# Altium PCB 控制器终.PcbDoc (part 1 of 2)
Units mil, origin at the board's own origin, x right, y up, seen from the top; angles counter-clockwise.
Board outline 4045 x 3522 mil, 2 copper layers (Top Layer, Bottom Layer); 118 components, 129 nets, 483 pads, 116 vias.
Unrouted connection lines stored in the file: 1.
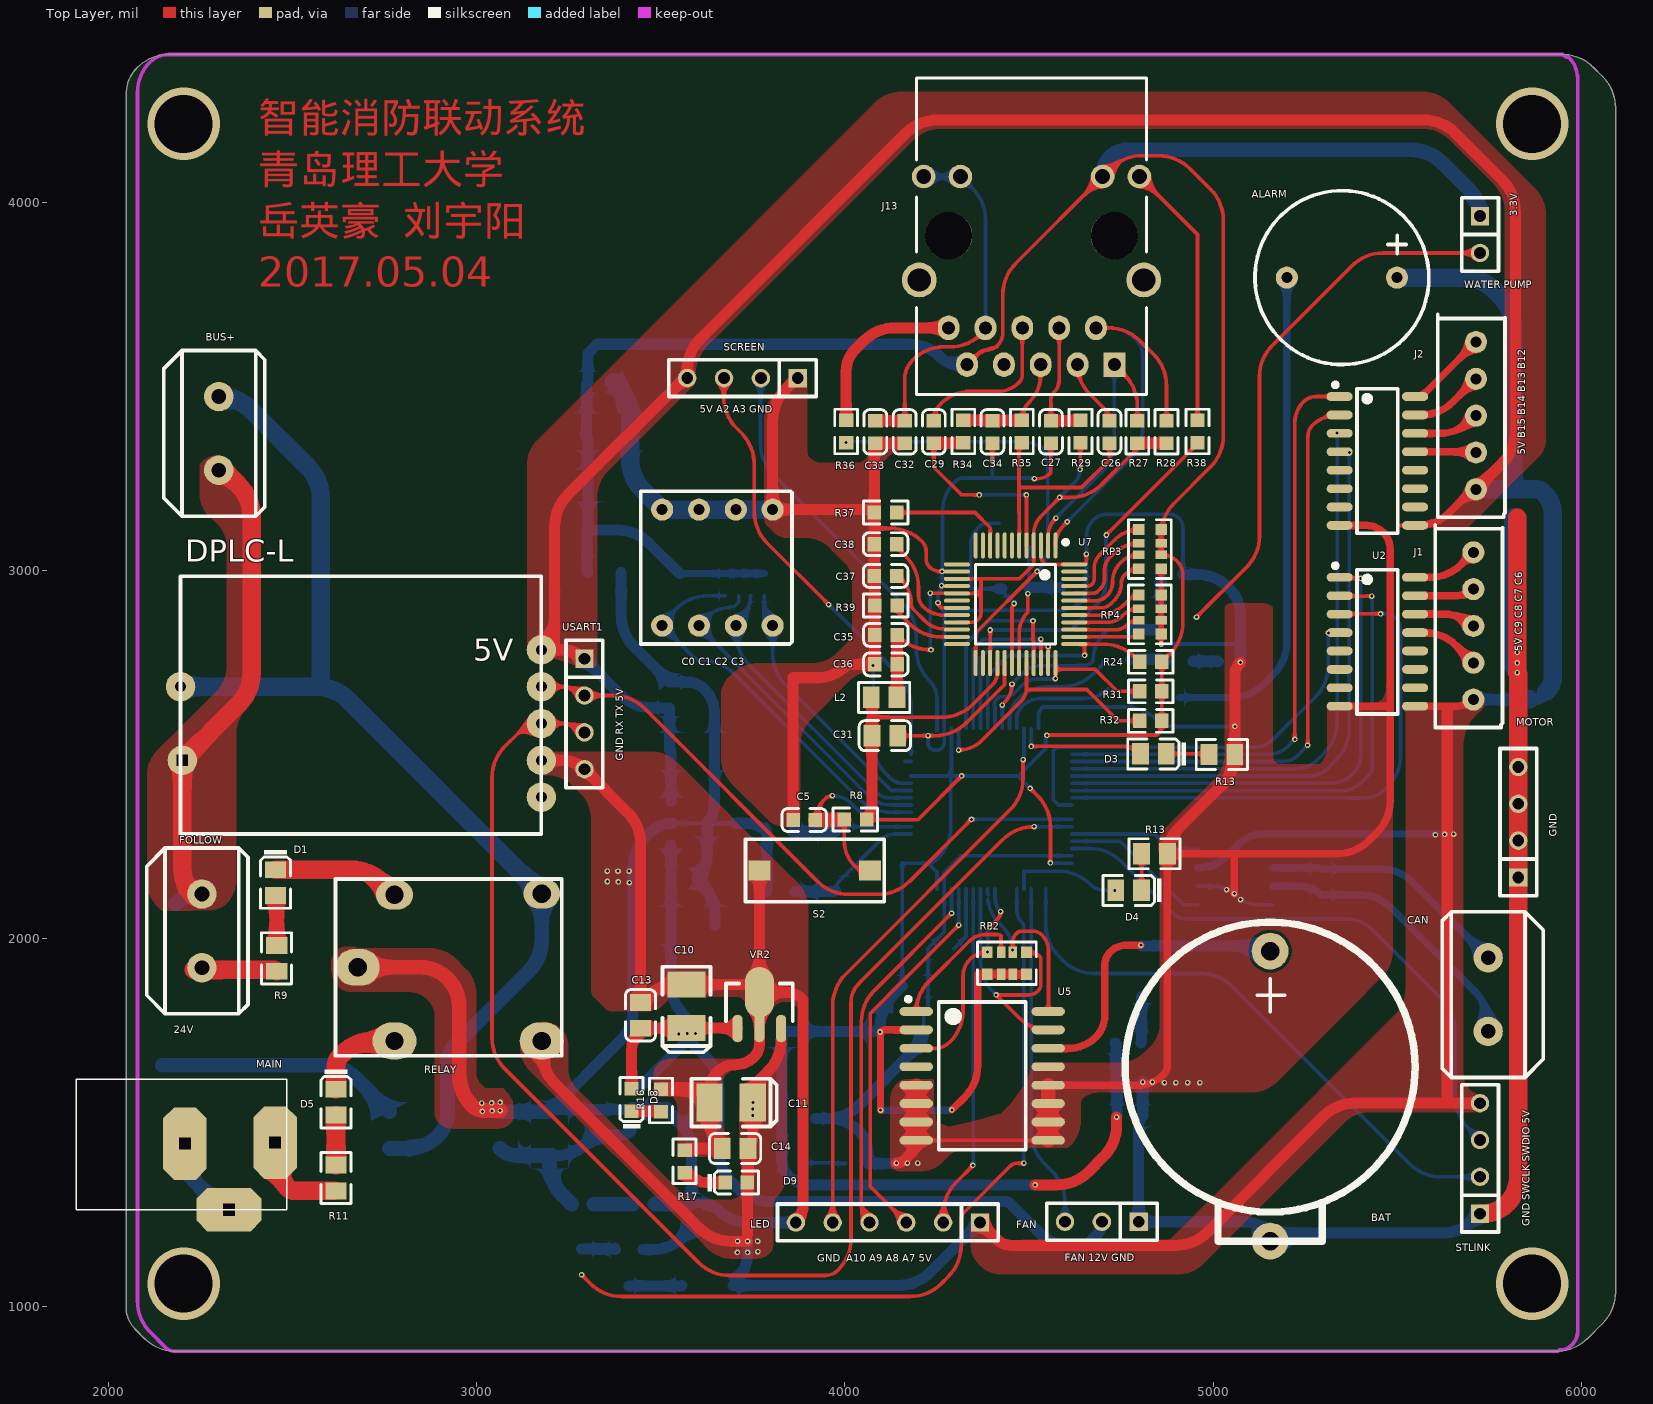
[diagram p0: Top Layer view]
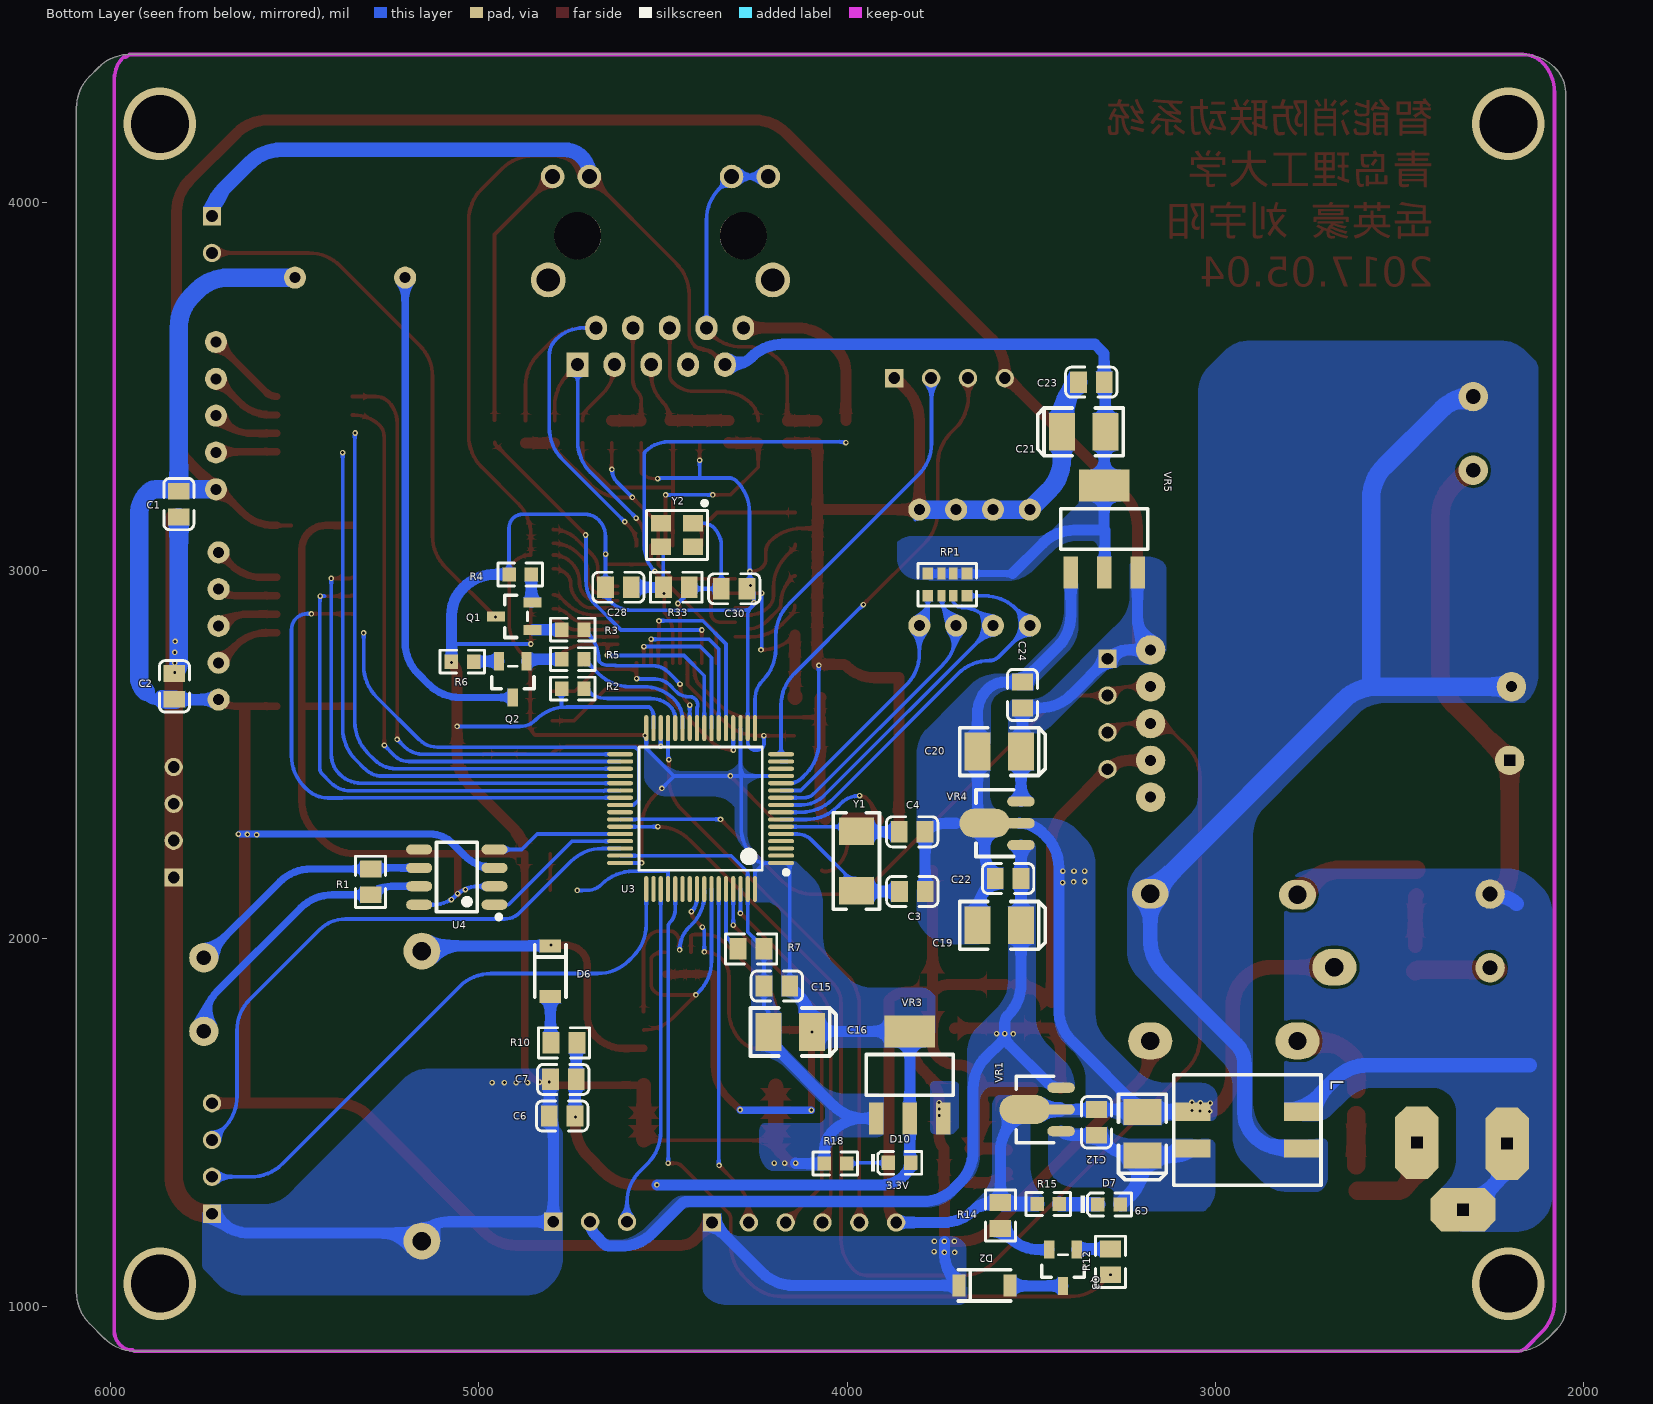
[diagram p1: Bottom Layer view, seen from below]

## Layer stack, top to bottom
Top Solder: solder mask 0.4, Solder Resist, Dk 3.5
Top Layer: signal copper 1.4
Dielectric 1: dielectric 12.6, FR-4, Dk 4.8
Bottom Layer: signal copper 1.4
Bottom Solder: solder mask 0.4, Solder Resist, Dk 3.5

## Board outline
2073,939 cw(c2133.36,999.36) 2048,999.36 2048,4291.66 cw(c2152.63,4291.66) 2078.64,4365.64 cw(c2164,4280.29) 2164,4401 5949,4401 cw(c5949,4282.7) 6032.65,4366.35 6057.64,4341.36 cw(c5972.29,4256) 6093,4256 6093,1040 cw(c5972.29,1040) 6057.64,954.64 6017.36,914.36 cw(c5932,999.71) 5932,879 2183,879 cw(c2183,999.71) 2097.64,914.36

## Design rules (kind name [scope] priority, off if disabled: settings)
Clearance [All] p1: gap=8
PlaneConnect [All] p1: planeconnectstyle=Direct reliefexpansion=20 reliefentries=4 reliefconductorwidth=10 reliefairgap=10
PolygonConnect [All] p1: connectstyle=Direct reliefconductorwidth=10 reliefentries=4 polygonreliefangle="90 Angle" airgapwidth=10
RoutingVias [All] p1: holewidth=8 width=15 viastyle="Through Hole" minholewidth=5 minwidth=10 maxholewidth=28 maxwidth=50
SolderMaskExpansion [All] p1: expansion=4
Width [All] p1: maxlimit=80 minlimit=10 preferedwidth=30
29 further rules are at their usual default settings.

## Classes and differential pairs
component class 控制器: ALARM BAT "C0 C1 C2 C3" C1 C2 C3 C4 C5 C6 C7 C9 C11 C12 C13 C14 C15 C16 C19 C20 C21 C22 C23 C26 C27 C28 C29 C30 C31 C32 C33 C34 C35 C36 C37 C38 CAN D1 D2 D3 D4 D5 D6 D7 D8 D9 D10 FAN FOLLOW GND J1 J2 J13 J14 L2 LED MOTOR Q1 Q2 Q3 R1 R2 R3 R4 R5 R6 R7 R8 R9 R10 R11 R13 R14 R15 R16 R17 R18 R24 R27 R28 R29 R31 R32 R33 R34 R35 R36 R37 R38 R39 RELAY RP1 RP2 RP3 RP4 S2 SCREEN STLINK U2 U3 U4 U5 U7 USART1 VR1 VR2 VR3 VR4 VR5 "WATER PUMP" Y1 Y2

## Components (designator, comment, footprint, x,y, rotation, side; value= is the part's Value field where it differs from the comment)
ALARM "蜂鸣器" 蜂鸣器 5349.9,3795 r90 top (schematic designator w1)
BAT "BAT" BAT 5155,1651 r270 top (schematic designator 1)
BUS+ "followSOURCE" 蓝端子 2300,3272 r90 top (schematic designator P1)
"C0 C1 C2 C3" "SW-DIP4" 4位拨码开关 3504,2850 r90 top (schematic designator S1)
C1 "100nF(104) 10% 50V" LC-0805_C 5815,3180 r90 bottom
C2 "100nF(104) 10% 50V" LC-0805_C 5827,2685 r270 bottom
C3 "22pF (220) 5% 50V" LC-0805_C 3823,2128 r0 bottom
C4 "22pF (220) 5% 50V" LC-0805_C 3823.38,2290 r0 bottom
C5 "100nF(104) 10% 50V" LC-0603_C 3890,2322 r0 top
C6 "100nF(104) 10% 50V" LC-0805_C 4774,1518.22 r180 bottom
C7 "1uF (105) 10% 50V" LC-0805_C 4771,1617.6 r180 bottom
C9 "220uF (227) ±10% 50V" LC-CASE-B_3528 3198.25,1470 r270 bottom
C10 "220uF (227) ±10% 50V" LC-CASE-B_3528 3570,1815.79 r270 top
C11 "220uF (227) ±10% 50V" LC-CASE-B_3528 3691,1554.66 r0 top
C12 "100nF(104) 10% 50V" LC-0805_C 3322.9,1501 r270 bottom
C13 "100nF(104) 10% 50V" LC-0805_C 3445.34,1791.79 r270 top
C14 "100nF(104) 10% 50V" LC-0805_C 3702,1430 r0 top
C15 "100nF(104) 10% 50V" LC-0805_C 4191,1871 r0 bottom
C16 "220uF (227) ±10% 50V" LC-CASE-B_3528 4155,1746.34 r180 bottom
C19 "220uF (227) ±10% 50V" LC-CASE-B_3528 3587,2036 r180 bottom
C20 "220uF (227) ±10% 50V" LC-CASE-B_3528 3587,2508 r180 bottom
C21 "220uF (227) ±10% 50V" LC-CASE-B_3528 3358,3376 r0 bottom
C22 "100nF(104) 10% 50V" LC-0805_C 3563,2163 r180 bottom
C23 "100nF(104) 10% 50V" LC-0805_C 3337,3511 r0 bottom
C24 "100nF(104) 10% 50V" LC-0805_C 3524,2661.59 r90 bottom
C26 "6.8nF (682) 10% 50V" LC-0603_C 4718.63,3376 r90 top
C27 "22nF (223) 10% 50V" LC-0603_C 4559.63,3376 r90 top
C28 "18pF (180) 5% 50V" LC-0805_C 4621.25,2954 r0 bottom
C29 "6.8nF (682) 10% 50V" LC-0603_C 4241.63,3376 r90 top
C30 "18pF (180) 5% 50V" LC-0805_C 4306.75,2950 r180 bottom
C31 "100nF(104) 10% 50V" LC-0805_C 4108.63,2551 r180 top
C32 "100nF (104) 10% 50V" LC-0603_C 4162.63,3376 r90 top
C33 "100nF (104) 10% 50V" LC-0603_C 4082.63,3376 r90 top
C34 "10nF (103) 10% 50V" LC-0603_C 4400.63,3376 r90 top
C35 "4.7uF (475) 10% 16V" LC-0603_C 4111.63,2824.82 r0 top
C36 "100nF (104) 10% 50V" LC-0603_C 4111.63,2744.73 r0 top
C37 "10nF (103) 10% 50V" LC-0603_C 4110.63,2985 r180 top
C38 "4.7uF (475) 10% 25V" LC-0603_C 4110.63,3071 r180 top
CAN "STLINK" SIP4 5725,1252.99 r90 top (schematic designator J5)
D1 "蓝灯 0805" LC-0805_LED_S1 2454,2152 r270 top
D2 "LL4148 LL-34 1206" LC-LL-34 3627,1058 r180 bottom
D3 "翠绿 0805" LC-0805_LED_S1 4838,2501.64 r180 top
D4 "翠绿 0805" LC-0805_LED_S1 4771,2131 r180 top
D5 "黄灯 0805" LC-0805_LED_S1 2618,1555.56 r270 top
D6 "LL4148 LL-34 1206" LC-LL-34 4806,1911.5 r270 bottom
D7 "白灯 0603" LC-0603_LED_S1 3288.68,1278.21 r180 bottom
D8 "白灯 0603" LC-0603_LED_S1 3420.91,1562 r90 top
D9 "白灯 0603" LC-0603_LED_S1 3705,1337.23 r0 top
D10 "白灯 0603" LC-0603_LED_S1 3858,1391 r180 bottom
DPLC-L "Comment" DPLC-L 3176,2784 r0 top
FAN "fan" SIP3 4798,1231 r180 top (schematic designator J3)
FOLLOW "followSOURCE" 蓝端子 2254,1921 r90 top (schematic designator P1)
GND "GND" SIP4 5829,2166 r90 top (schematic designator J8)
J1 "stepmotor1 out" 防反插乘5 5707,3049.01 r0 top
J2 "stepmotor2 out" 防反插乘5 5714,3620.02 r0 top
J13 "RJ45" RJ-45_GBE 4507,3814 r0 top
L "Comment" 共模电感 2763.28,1530 r270 bottom
L2 "100uH ±10%" LC-0805_L 4106.63,2655 r0 top
LED "CON6" SIP6 4367,1229 r180 top (schematic designator J9)
MAIN "DC JK" DC 2452.72,1446 r270 top (schematic designator J10)
MOTOR "ULN2003AFWG" LC-SOIC-16_150mil 5446.19,2806 r270 top (schematic designator U1)
Q1 "SS8050 Y1" LC-SOT-23(SOT-23-3) 4904,2875 r180 bottom
Q2 "SS8050 Y1" LC-SOT-23(SOT-23-3) 4908,2704 r90 bottom
Q3 "SS8050 Y1" LC-SOT-23(SOT-23-3) 3414,1106 r90 bottom
R1 "120Ω (1200) ±1%" LC-0805_R 5294,2154 r90 bottom
R2 "10KΩ (1002) ±1%" LC-0603_R 4745,2678.53 r0 bottom
R3 "1KΩ (1001) ±1%" LC-0603_R 4745,2838.71 r0 bottom
R4 "10KΩ (1002) ±1%" LC-0603_R 4888,2989 r0 bottom
R5 "1KΩ (1001) ±1%" LC-0603_R 4745,2758.62 r0 bottom
R6 "10KΩ (1002) ±1%" LC-0603_R 5044.86,2752 r0 bottom
R7 "10KΩ (1002) ±1%" LC-0805_R 4261,1972 r0 bottom
R8 "10KΩ (1002) ±1%" LC-0603_R 4028.75,2323 r180 top
R9 "750Ω (7500) ±1%" LC-0805_R 2457,1946.26 r90 top
R10 "200Ω (2000) ±1%" LC-0805_R 4769,1716.98 r0 bottom
R11 "1KΩ (1001) ±1%" LC-0805_R 2618,1349.82 r90 top
R12 "1KΩ (1001) ±1%" LC-0805_R 3285,1122.08 r90 bottom (schematic designator R11)
R13 "470Ω (4700) ±1%" LC-0805_R 5024.06,2500 r180 top
R13 "470Ω (4700) ±1%" LC-0805_R 4841,2230.38 r180 top
R14 "10KΩ (1002) ±1%" LC-0805_R 3584,1248 r90 bottom
R15 "1KΩ (1001) ±1%" LC-0603_R 3454.07,1279.21 r180 bottom
R16 "1KΩ (1001) ±1%" LC-0603_R 3501,1560.24 r270 top
R17 "1KΩ (1001) ±1%" LC-0603_R 3565,1395 r270 top
R18 "1KΩ (1001) ±1%" LC-0603_R 4032,1389 r180 bottom
R24 "10KΩ (1002) ±1%" LC-0603_R 4830.63,2751.55 r0 top
R27 "49.9Ω (49R9) ±1%" LC-0603_R 4794.37,3376 r270 top
R28 "49.9Ω (49R9) ±1%" LC-0603_R 4873.37,3376 r270 top
R29 "10Ω (10R0) ±1%" LC-0603_R 4639.63,3377 r270 top
R31 "10KΩ (1002) ±1%" LC-0603_R 4830.63,2671.46 r0 top
R32 "10KΩ (1002) ±1%" LC-0603_R 4830.63,2591.37 r0 top
R33 "1MΩ (1004) ±1%" LC-0805_R 4464,2954 r0 bottom
R34 "82Ω (82R0) ±1%" LC-0603_R 4321.63,3377 r270 top
R35 "82Ω (82R0) ±1%" LC-0603_R 4480.63,3377 r270 top
R36 "330Ω (3300) ±1%" LC-0603_R 4003.63,3377 r90 top
R37 "12KΩ (1202) ±1%" LC-0603_R 4110.63,3157 r0 top
R38 "330Ω (3300) ±1%" LC-0603_R 4957.63,3377 r90 top
R39 "10KΩ (1002) ±1%" LC-0603_R 4111.63,2904.91 r180 top
RELAY "继电器" RLY-964 2677,1922 r180 top (schematic designator *1)
RP1 "1KΩ (102) ±5%" LC-0603_Rx4 3728,2961 r0 bottom
RP2 "10KΩ (103) ±5%" LC-0603_Rx4 4440,1933 r0 top
RP3 "10KΩ (103) ±5%" LC-0603_Rx4 4828.63,3057.6 r270 top
RP4 "10KΩ (103) ±5%" LC-0603_Rx4 4828.63,2880.26 r90 top
S2 "SW SPST" 单片机小按键 3768.25,2185 r0 top
SCREEN "SCREEN" SIP4 3872,3522 r180 top (schematic designator J7)
STLINK "CAN" 蓝端子 5747,1948 r270 top (schematic designator J6)
U2 "ULN2003AFWG" LC-SOIC-16_150mil 5446.19,3297 r270 top
U3 "STM32 R8T6" LC-LQFP-64_10x10x05P 4398,2353 r90 bottom
U4 "CAN/TJA1050T/CM" LC-SOIC-8_150mil 5060,2167 r90 bottom
U5 "DS3231M+TRL" LC-SOIC-16_300mil 4373,1627 r270 top
U7 "W5500" LC-LQFP-48_7x7x05P 4463.63,2908 r180 top
USART1 "CON2" SIP4 3293,2760 r270 top (schematic designator J12)
VR1 "78L12G-AB3-R" LC-SOT-89(SOT-89-3) 3419,1536 r180 bottom
VR2 "78L05G-AB3-R" LC-SOT-89(SOT-89-3) 3768,1755.79 r270 top
VR3 "AMS1117-3.3" LC-SOT-223 3829.97,1630 r270 bottom
VR4 "78L05G-AB3-R" LC-SOT-89(SOT-89-3) 3528,2313.25 r180 bottom
VR5 "AMS1117-3.3" LC-SOT-223 3302,3112 r270 bottom
"WATER PUMP" "water pump" SIP2 5725,3962 r270 top (schematic designator J4)
Y1 "8MHz ±20ppm 20pF" LC-SMD-5032_2P 3975,2211 r270 bottom
Y2 "25MHZ 12PF 10PPM" LC-SMD-3225_4P 4462,3096 r0 bottom

## Footprints (in the part's own frame and the unit in brackets; to place one, negate y for a bottom-side part, rotate by r counter-clockwise, add the part's x,y. Pads: shape width x height; smd on the part's side, far side on the other; paste and mask are expansions set on the pad)
4位拨码开关 [mil]
  round 60 hole 30: 1(0,0) 2(0,-100) 3(0,-200) 4(0,-300) 5(315,-300) 6(315,-200) 7(315,-100) 8(315,0)
  silkscreen extent -50,-353 365,59
BAT [mm]
  round 2.54 hole 1.27: 1(12,0) 2(-8,0)
  silkscreen extent -10,-10 12,10
DC [mm]
  oct 5x3 hole 0.8 square: 1(0,0) 2(0.07,-6.22)
  oct 3x4.5 hole 0.8 square: 3(4.63,-3.17)
  silkscreen extent -4.36,-13.7 4.64,0.8
DPLC-L [mil]
  round 80 hole 30: 1(0,0) 2(0,-100) 3(0,-200) 4(0,-300) 5(0,-400) 6(-980,-100)
  round 80 hole 30 square: 5(-975,-300)
  silkscreen extent -980,-500 0,200
LC-0603_C [mm]
  rect 0.93x0.98 smd: 1(-0.77,0) 2(0.77,0)
  silkscreen extent -1.53,-0.79 1.54,0.79, body extent -0.8,-0.4 0.8,0.4, height 0.3
LC-0603_LED_S1 [mm]
  rect 0.93x0.98 smd: A(0.77,0) K(-0.77,0)
  silkscreen extent -1.98,-0.79 1.53,0.79, body extent -0.8,-0.4 0.8,0.4, height 0.6
LC-0603_R [mm]
  rect 0.93x0.98 smd: 1(-0.77,0) 2(0.77,0)
  silkscreen extent -1.53,-0.79 1.54,0.79, body extent -0.85,-0.4 0.85,0.4, height 0.56
LC-0603_Rx4 [mm]
  rect 0.75x0.8 smd mask+0.051: 1(-1.35,-0.77) 4(1.35,-0.77) 5(1.35,0.77) 8(-1.35,0.77)
  rect 0.58x0.8 smd mask+0.051: 2(-0.4,-0.77) 3(0.4,-0.77) 6(0.4,0.77) 7(-0.4,0.77)
  silkscreen extent -2.02,-1.47 2.02,1.47, body extent -1.6,-0.8 1.6,0.8, height 0.55
LC-0805_C [mm]
  rect 1.16x1.47 smd: 1(-0.89,0) 2(0.89,0)
  silkscreen extent -1.77,-1.04 1.77,1.04, body extent -1,-0.63 1,0.62, height 0.77
LC-0805_L [mm]
  rect 1.16x1.47 smd: 1(-0.89,0) 2(0.89,0)
  silkscreen extent -1.77,-1.04 1.77,1.03, body extent -1.02,-0.64 1.03,0.64, height 0.6
LC-0805_LED_S1 [mm]
  rect 1.16x1.47 smd: A(0.89,0) K(-0.89,0)
  silkscreen extent -2.25,-1.03 1.77,1.03, body extent -1.01,-0.63 1.01,0.62, height 1.1
LC-0805_R [mm]
  rect 1.16x1.47 smd: 1(-0.89,0) 2(0.89,0)
  silkscreen extent -1.77,-1.03 1.77,1.03, body extent -1,-0.62 1,0.62, height 0.49
LC-CASE-B_3528 [mm]
  rect 1.8x2.6 smd: 1(1.5,0) 2(-1.5,0)
  silkscreen extent -2.73,-1.65 3.16,1.65, body extent -1.85,-1.47 1.85,1.46, height 2.03
LC-LL-34 [mm]
  rect 0.9x1.5 smd: 1(1.75,0) 2(-1.75,0)
  silkscreen extent -1.8,-1.07 1.8,1.07
LC-LQFP-48_7x7x05P [mm]
  oval 0.28x1.8 smd mask+0.051: 1(-2.75,-4.05) 2(-2.25,-4.05) 3(-1.75,-4.05) 4(-1.25,-4.05) 5(-0.75,-4.05) 6(-0.25,-4.05) 7(0.25,-4.05) 8(0.75,-4.05) 9(1.25,-4.05) 10(1.75,-4.05) 11(2.25,-4.05) 12(2.75,-4.05) 25(2.75,4.05) 26(2.25,4.05) 27(1.75,4.05) 28(1.25,4.05) 29(0.75,4.05) 30(0.25,4.05) 31(-0.25,4.05) 32(-0.75,4.05) 33(-1.25,4.05) 34(-1.75,4.05) 35(-2.25,4.05) 36(-2.75,4.05)
  oval 1.8x0.28 smd mask+0.051: 13(4.05,-2.75) 14(4.05,-2.25) 15(4.05,-1.75) 16(4.05,-1.25) 17(4.05,-0.75) 18(4.05,-0.25) 19(4.05,0.25) 20(4.05,0.75) 21(4.05,1.25) 22(4.05,1.75) 23(4.05,2.25) 24(4.05,2.75) 37(-4.05,2.75) 38(-4.05,2.25) 39(-4.05,1.75) 40(-4.05,1.25) 41(-4.05,0.75) 42(-4.05,0.25) 43(-4.05,-0.25) 44(-4.05,-0.75) 45(-4.05,-1.25) 46(-4.05,-1.75) 47(-4.05,-2.25) 48(-4.05,-2.75)
  silkscreen extent -3.6,-4.42 2.75,2.75
LC-LQFP-64_10x10x05P [mm]
  oval 0.28x1.8 smd mask+0.051: 1(-3.75,-5.55) 2(-3.25,-5.55) 3(-2.75,-5.55) 4(-2.25,-5.55) 5(-1.75,-5.55) 6(-1.25,-5.55) 7(-0.75,-5.55) 8(-0.25,-5.55) 9(0.25,-5.55) 10(0.75,-5.55) 11(1.25,-5.55) 12(1.75,-5.55) 13(2.25,-5.55) 14(2.75,-5.55) 15(3.25,-5.55) 16(3.75,-5.55) 33(3.75,5.55) 34(3.25,5.55) 35(2.75,5.55) 36(2.25,5.55) 37(1.75,5.55) 38(1.25,5.55) 39(0.75,5.55) 40(0.25,5.55) 41(-0.25,5.55) 42(-0.75,5.55) 43(-1.25,5.55) 44(-1.75,5.55) 45(-2.25,5.55) 46(-2.75,5.55) 47(-3.25,5.55) 48(-3.75,5.55)
  oval 1.8x0.28 smd mask+0.051: 17(5.55,-3.75) 18(5.55,-3.25) 19(5.55,-2.75) 20(5.55,-2.25) 21(5.55,-1.75) 22(5.55,-1.25) 23(5.55,-0.75) 24(5.55,-0.25) 25(5.55,0.25) 26(5.55,0.75) 27(5.55,1.25) 28(5.55,1.75) 29(5.55,2.25) 30(5.55,2.75) 31(5.55,3.25) 32(5.55,3.75) 49(-5.55,3.75) 50(-5.55,3.25) 51(-5.55,2.75) 52(-5.55,2.25) 53(-5.55,1.75) 54(-5.55,1.25) 55(-5.55,0.75) 56(-5.55,0.25) 57(-5.55,-0.25) 58(-5.55,-0.75) 59(-5.55,-1.25) 60(-5.55,-1.75) 61(-5.55,-2.25) 62(-5.55,-2.75) 63(-5.55,-3.25) 64(-5.55,-3.75)
  silkscreen extent -4.55,-6.05 4.25,4.25
LC-SMD-3225_4P [mm]
  rect 1.4x1.15 smd: 1(-1.1,-0.8) 2(1.1,-0.8) 3(1.1,0.8) 4(-1.1,0.8)
  silkscreen extent -2.1,-2.35 2.1,1.7, body extent -1.6,-1.25 1.6,1.25, height 0.61
LC-SMD-5032_2P [mm]
  rect 1.9x2.4 smd: 1(-2.05,0) 2(2.05,0)
  silkscreen extent -3.33,-1.6 3.33,1.6
LC-SOIC-8_150mil [mm]
  oval 0.7x1.8 smd: 1(-1.905,-2.6) 2(-0.635,-2.6) 3(0.635,-2.6) 4(1.905,-2.6) 5(1.905,2.6) 6(0.635,2.6) 7(-0.635,2.6) 8(-1.905,2.6)
  silkscreen extent -2.9,-3.05 2.4,1.4
LC-SOIC-16_150mil [mm]
  oval 0.6x1.8 smd: 1(-4.445,-2.6) 2(-3.175,-2.6) 3(-1.905,-2.6) 4(-0.635,-2.6) 5(0.635,-2.6) 6(1.905,-2.6) 7(3.175,-2.6) 8(4.445,-2.6) 9(4.445,2.6) 10(3.175,2.6) 11(1.905,2.6) 12(0.635,2.6) 13(-0.635,2.6) 14(-1.905,2.6) 15(-3.175,2.6) 16(-4.445,2.6)
  silkscreen extent -5.4,-3.05 4.97,1.4
LC-SOIC-16_300mil [mm]
  oval 0.6x2.3 smd: 1(-4.445,-4.55) 2(-3.175,-4.55) 3(-1.905,-4.55) 4(-0.635,-4.55) 5(0.635,-4.55) 6(1.905,-4.55) 7(3.175,-4.55) 8(4.445,-4.55) 9(4.445,4.55) 10(3.175,4.55) 11(1.905,4.55) 12(0.635,4.55) 13(-0.635,4.55) 14(-1.905,4.55) 15(-3.175,4.55) 16(-4.445,4.55)
  silkscreen extent -5.45,-5.25 5.1,3
LC-SOT-23(SOT-23-3) [mm]
  rect 1.25x0.7 smd: 1(1.25,-0.95) 2(1.25,0.95) 3(-1.25,0)
  silkscreen extent -0.65,-1.46 0.9,1.46, body extent -1.5,-1.5 1.5,1.5, height 1.3
LC-SOT-89(SOT-89-3) [mm]
  oval 1.9x0.7 smd: 1(0,-1.5) 3(0,1.5)
  oval 3.5x2 smd: 2(-2.5,0)
  oval 2.1x0.7 smd: 2(-0.1,0)
  silkscreen extent -3.1,-2.3 -0.5,2.3, body extent -3.75,-2.25 0.55,2.25, height 1.51
LC-SOT-223 [mm]
  rect 2.2x1 smd: 1(3,-2.3) 2(3,0) 3(3,2.3)
  rect 2.2x3.5 smd: 2(-3,0)
  silkscreen extent -1.4,-3 1.4,3, body extent -3.49,-3.24 3.49,3.24, height 1.64
RJ-45_GBE [mil]
  rect 59.06x66.93 hole 35.43: 1(225,-255.5)
  oval 59.06x66.93 hole 35.43: 2(175,-155.5) 3(125,-255.5) 4(75,-155.5) 5(25,-255.5) 6(-25,-155.5) 7(-75,-255.5) 8(-125,-155.5) 9(-175,-255.5) 10(-225,-155.5)
  round 64 hole 40: 11(293,255.5) 12(193,255.5) 13(-193,255.5) 14(-293,255.5)
  round 94.49 hole 62.99: SH(-305,-25.5) SH(305,-25.5)
  round 128 hole 128 unplated: ""(-225,94.5) ""(225,94.5)
  silkscreen extent -313,-337 313,523, body extent -313,-337 313,523, height 528
RLY-964 [mil]
  oval 120x100 hole 50: 1(0,0) 3(-500,200) 5(-100,200)
  oval 100x80 hole 50: 2(-500,-200) 4(-100,-196.85)
  silkscreen extent -554,-240 60,240
SIP2 [mil]
  rect 50x50 hole 32: 1(0,0)
  round 50 hole 32: 2(100,0)
  silkscreen extent -50,-50 150,50
SIP3 [mil]
  rect 50x50 hole 32: 1(0,0)
  round 50 hole 32: 2(100,0) 3(200,0)
  silkscreen extent -50,-50 250,50
SIP4 [mil]
  rect 50x50 hole 32: 1(0,0)
  round 50 hole 32: 2(100,0) 3(200,0) 4(300,0)
  silkscreen extent -50,-50 350,50
SIP6 [mil]
  rect 50x50 hole 32: 1(0,0)
  round 50 hole 32: 2(100,0) 3(200,0) 4(300,0) 5(400,0) 6(500,0)
  silkscreen extent -50,-50 550,50
共模电感 [mil]
  rect 50x100 smd: 1(0,0) 2(100,0) 3(100,-300) 4(0,-300)
  silkscreen extent -100,-350 200,50
单片机小按键 [mil]
  rect 60x55 smd: 1(0,0) 2(300,0)
  silkscreen extent -38,-85 339,85
蓝端子 [mil]
  round 80 hole 40: 1(0,0) 2(200,0)
  silkscreen extent -125,-125 325,150
蜂鸣器 [mil]
  round 60 hole 30: 1(0,-149.61) 2(0,149.61)
  silkscreen extent -236,-236 236,236
防反插乘5 [mil]
  round 60 hole 30: 1(0,0) 2(0,-100) 3(0,-200) 4(0,-300) 5(0,-400)
  silkscreen extent -104,-476 79,75

## Part data
BUS+ FOLLOW STLINK: library part 蓝端子
"C0 C1 C2 C3": "4位拨码开关"
C1 C2 C5 C6 C12 C13 C14 C15 C22 C23 C24 C31: library part "0805 100nF(104) 10% 50V", "贴片电容"
C3 C4: library part "0805 22pF (220) 5% 50V", "贴片电容"
C7: library part "0805 1uF (105) 10% 50V", "贴片电容"
C9 C10 C11 C16 C19 C20 C21: library part "3528 100uF (107) 10% 6.3V", "钽电容"
C26 C29: library part "0603 6.8nF (682) 10% 50V", "贴片电容"
C27: library part "0603 22nF (223) 10% 50V", "贴片电容"
C28 C30: library part "0805 18pF (180) 5% 50V", "贴片电容"
C32 C33 C36: library part "0603 100nF (104) 10% 50V", "贴片电容"
C34: library part "0603 10nF (103) 10% 50V", "贴片电容"
C35: library part "0603 4.7uF (475) 10% 16V", "贴片电容"
C37: library part "0805 10nF (103) 10% 50V", "贴片电容"
C38: library part "0805 4.7uF (475) 10% 25V", "贴片电容"
CAN GND SCREEN: library part CON4
D1: library part "0805 蓝灯", "发光二极管"
D2 D6: library part "LL-34 LL4148 LL-34 1206", "开关二极管"
D3 D4: library part "0805 翠绿", "发光二极管"
D5: library part "0805 黄灯", "发光二极管"
D7 D8 D9 D10: library part "0603 白灯", "发光二极管"
FAN: library part CON3
J1 J2: library part CON5
L2: library part "0805 100uH 10%", "贴片电感"
MOTOR U2: "大电流驱动"
Q1 Q2 Q3: library part "SOT-23 SS8050 Y1", "三极管"
R1: library part "0805 120Ω (1200) 1%", "贴片电阻"
R2 R4 R6 R7 R8 R14 R24 R31 R32 R39: library part "0805 10KΩ (1002) 1%", "贴片电阻"
R3 R5 R11 R12: library part "0805 1KΩ (1001) 1%", "贴片电阻"
R9: library part "0805 750Ω (7500) 1%", "贴片电阻"
R10: library part "0805 200Ω (2000) 1%", "贴片电阻"
R13 R13: library part "0805 470Ω (4700) 1%", "贴片电阻"
R15 R16 R17 R18: library part "0603 1KΩ (1001) 1%", "贴片电阻"
R27 R28: library part "0603 49.9Ω (49R9) 1%", "贴片电阻"
R29: library part "0805 10Ω (10R0) 1%", "贴片电阻"
R33: library part "0805 1MΩ (1004) 1%", "贴片电阻"
R34 R35: library part "0603 82Ω (82R0) 1%", "贴片电阻"
R36 R38: library part "0603 330Ω (3300) 1%", "贴片电阻"
R37: library part "0805 12KΩ (1202) 1%", "贴片电阻"
RP1: library part "0603*4  1KΩ (102) 5%", "贴片排阻"
RP2 RP3 RP4: library part "0603*4  10KΩ (103) 5%", "贴片排阻"
S2: "单刀单掷开关"
U4: "CAN"
U5: "实时时钟"
U7: "以太网"
VR1: library part "SOT-89 78L12G-AB3-R", "低压差线性稳压(LDO)"
VR2 VR4: library part "SOT-89 78L05G-AB3-R", "低压差线性稳压(LDO)"
VR3 VR5: library part "SOT-223 AMS1117-3.3", "低压差线性稳压(LDO)"
"WATER PUMP": library part CON2
Y1: library part "SMD-5032_2P 8MHz 20ppm 20pF", "贴片晶振"
Y2: library part "SMD-3225_4P  25MHZ 12PF 10PPM", "贴片晶振"

## Via types
v1: diameter 15, hole 8, Top Layer to Bottom Layer, 112 vias
v2: diameter 196.85, hole 157.48, Top Layer to Bottom Layer, 3 vias
v3: diameter 196.85/196.85 (per signal layer), hole 157.48, Top Layer to Bottom Layer, 1 vias

## Nets (pads, with @x,y where several pads share a name; then routed paths per layer and width w, separated by ;. In a path a pad name is that pad's centre, name@x,y a point inside that pad or via, vN(x,y) a via of type N, cw(c..) or ccw(c..) an arc to the next point about the centre after c; other vN are vias at no path point)
3.3V: "WATER PUMP.1" C6.2 C7.2 C15.1 C16.1 C21.2 C23.1 C31.2 D10.A J13.9 J13.12 L2.1 R8.1 R10.1 R24.2 R31.2 R32.2 RP1.1 RP1.2 RP1.3 RP1.4 RP2.1 RP2.2 RP2.3 RP2.4 RP3.6 RP3.7 RP3.8 U3.1 U3.13 U3.19 U3.32 U3.48 U3.64 U5.2 U7.28 VR3.2 VR5.2 | length 12189.5
  Top Layer w10: R8.1@4059.07,2323 4198.42,2323 v1(4317,2441.58) ; 4068,2603 ccw(c4072.83,2607.83) 4072.83,2601 4073.59,2601 4263,2601 ccw(c4263,2721.71) 4315.47,2613 ccw(c4263,2721.71) 4348.36,2636.36 4400,2688 ccw(c4365.19,2722.81) 4414.42,2722.81 U7.28@4414.42,2748.55 ; J13.9@4332,3558.5 J13.9@4347.14,3573.64 ; 4414.09,3607.59 ccw(c4432.5,3488.29) 4410.44,3606.97 ; v1(4503,2408) 4523.01,2387.99 cw(c4437.65,2302.64) 4558.36,2302.64 v1(4558.36,2205.36) ; v1(4548.59,2552) ccw(c4548.59,2555.41) 4551,2553 4845.17,2553 ccw(c4845.17,2559.83) 4850,2555 ccw(c4823.58,2581.42) 4860.94,2581.42 R32.2@4860.94,2591.37 R31.2@4860.94,2671.46 R24.2@4860.94,2751.55 4882.64,2773.25 ccw(c4797.29,2858.61) 4888,2778.97 ccw(c4797.29,2858.61) 4918,2858.61 4918,2988.75 ccw(c4869.12,2988.75) 4903.68,3023.32 ccw(c4858.94,2978.58) 4879.63,3038.37 ccw(c4858.94,2978.58) RP3.6@4858.94,3041.85 RP3.7@4858.94,3073.34 RP3.8@4858.94,3096.94 ; RP3.8@4858.94,3110.75 RP3.8@4858.94,3096.94 ; J13.9@4347.14,3573.64 cw(c4432.5,3488.29) 4382.01,3597.93 ; J13.9@4347.14,3573.64 4362.66,3589.16 cw(c4384,3567.82) 4382.01,3597.93 ; 4382.01,3597.93 cw(c4384,3567.82) 4384,3598 ccw(c4384,3641.46) 4410.44,3606.97 ; 4382.01,3597.93 cw(c4432.5,3488.29) 4410.44,3606.97 ; 4410.44,3606.97 ccw(c4384,3641.46) 4414.73,3610.73 ccw(c4380.27,3645.18) 4429,3645.18 4429,3748.5 cw(c4549.71,3748.5) 4464.36,3833.86 J13.12@4700,4069.5 4721.14,4090.64 cw(c4806.5,4005.29) 4756.15,4115 cw(c4806.5,4005.29) 4806.5,4126 4852,4126 cw(c4852,4005.29) 4937.36,4090.64 4992.64,4035.36 cw(c4907.29,3950) 5028,3950 5028,3366 cw(c4907.29,3366) 4992.64,3280.64 4894.3,3182.3 ccw(c4979.65,3096.94) RP3.8@4858.94,3096.94
  Top Layer w20: v1(4095.94,1746.34) cw(c4109.6,1732.69) 4109.6,1752 U5.2@4193.87,1752 ; v1@4097,1746.34 4097,1535 ccw(c4098.41,1535) v1(4097.41,1534) ; v1(4291,1535) 4325.49,1569.49 ccw(c4240.14,1654.85) 4360.85,1654.85 4360.85,1903.69 RP2.3@4467.15,1903.69 ; RP2.3@4455.75,1902.69 RP2.4@4493.15,1902.69
  Top Layer w30: R8.1@4059.07,2323 ccw(c4024,2358.07) 4073.59,2358.07 C31.2@4073.59,2551 4073.59,2601 ; L2.1@4071.59,2655 cw(c4066.76,2650.17) 4073.59,2650.17 4073.59,2613 ; v1(4517,1331) 4576,1331 ccw(c4576,1451.71) 4661.36,1366.36 4702.64,1407.64 ccw(c4617.29,1493) 4738,1493 v1(4738,1515)
  Bottom Layer w10: D10.A@3827.68,1391 D10.A@3827.68,1393 ; C15.1@4155.96,1871 4155.96,2205.36 ccw(c4156.83,2206.24) 4156.83,2205 4225.36,2205 ; U3.13@4179.5,2441.58 4279,2441.58 4289.73,2452.31 ; U3.64@4250.36,2134.5 4250.36,2180 4225.36,2205 ; U3.19@4289.73,2571.5 4289.73,2452.31 ; v1(4503,2408) 4472.49,2438.51 cw(c4475.57,2441.58) 4471.22,2441.58 ; U3.32@4545.64,2552 4545.64,2516 4471.22,2441.58 ; v1(4558.36,2205.36) ccw(c4559.24,2206.24) 4559.24,2205 U3.48@4618,2205 ; R10.1@4733.96,1716.98 4733.96,1668 4735.77,1622.5 C7.2@4735.96,1617.6 ; 4225.36,2205 4225.86,2205 ccw(c4225.86,2239.14) 4250,2215 4252.64,2217.64 ccw(c4167.29,2303) 4288,2303 4288,2436.76 ccw(c4283.82,2440.94) 4289.73,2440.94 4289.73,2441.58 ; 4289.73,2441.58 4289.73,2452.31 ; 4289.73,2441.58 v1(4317,2441.58) 4471.22,2441.58
  Bottom Layer w20: 3564.92,2991.23 cw(c3569.31,2870.6) 3569.31,2991.31 RP1.1@3674.85,2991.31 RP1.2@3712.25,2991.31 RP1.3@3743.75,2991.31 RP1.4@3781.15,2991.31 ; v1(4097.41,1534) 4288.59,1534 ccw(c4288.59,1537.41) v1(4291,1535)
  Bottom Layer w30: C21.2@3294,3369 cw(c3274.69,3349.69) 3298.95,3362.24 cw(c3274.69,3349.69) 3302,3349.69 VR5.2@3302,3230.11 3302,3109 ; C21.2@3298.95,3376 3298.95,3503.72 cw(c3309.24,3503.72) C23.1@3301.96,3511 3301.96,3588.96 3327,3614 4175,3614 cw(c4175,3493.29) 4196.88,3612 cw(c4175,3493.29) 4260.36,3578.64 ccw(c4308.99,3627.28) 4275.03,3567.47 ccw(c4308.99,3627.28) 4308.99,3558.5 J13.9@4332,3558.5 ; VR5.2@3302,2993.89 cw(c3306.83,2998.72) 3300,2998.72 3300,3109 3302,3109 ; 3551,2991.31 3468.67,3073.64 ccw(c3383.31,2988.29) 3383.31,3109 3302,3109 ; D10.A@3827.68,1393 ccw(c3822.17,1398.51) 3829.97,1398.51 VR3.2@3829.97,1511.89 VR3.2@3829.97,1748.11 4091.68,1748.11 cw(c4091.68,1742.08) v1(4095.94,1746.34) 4095.94,1760.98 cw(c4216.65,1760.98) 4097.36,1779.42 cw(c4216.65,1760.98) 4131.3,1846.34 C15.1@4155.96,1871 ; D10.A@3830,1394 ccw(c3883.11,1394) 3845.56,1356.44 ccw(c3906.98,1417.87) 3906.98,1331 v1(4517,1331) ; R10.1@4733.96,1716.98 cw(c4729.13,1712.15) 4735.96,1712.15 C7.2@4735.96,1617.6 cw(c4728.72,1610.36) 4738.96,1610.36 C6.2@4738.96,1518.22 C6.2@4738.96,1518
  Bottom Layer w40: J13.12@4700,4069.5 4700,4072.3 cw(c4771.7,4072.3) 4721,4123 cw(c4766.87,4077.13) 4766.87,4142 5537,4142 cw(c5537,4021.29) 5622.36,4106.64 5695.3,4033.7 cw(c5623.6,3962) 5725,3962
3.3VA: C35.2 C36.2 L2.2 R27.2 R28.2 R29.2 U7.4 U7.15 U7.17 U7.21 | length 1711.2
  Top Layer w10: L2.2@4141.67,2655 L2.2@4141.67,2669.02 ; C35.2@4141.95,2824.82 4147.41,2819.36 ccw(c4232.77,2904.71) 4232.77,2784 v1(4234,2784) ; v1(4232,2938) 4303.71,2938 U7.17@4304.18,2937.53 4369.73,2937.53 ; U7.21@4304.18,2858.79 4343.32,2858.79 ccw(c4343.32,2886.46) 4362.88,2866.88 ccw(c4346.4,2883.39) 4369.73,2883.39 4369.73,2937.53 ; U7.15@4304.18,2976.9 4370,2976.9 ; v1(4639,3274) ccw(c4637.47,3275.53) 4639.63,3275.53 R29.2@4639.63,3346.68 ; R27.2@4794.37,3345.68 cw(c4757.39,3345.68) 4783.54,3319.54 4697.36,3233.36 cw(c4612,3318.71) 4612,3198 v1(4583,3198) cw(c4580.59,3198) 4582.29,3196.29 4533.99,3147.99 ccw(c4585.08,3096.92) 4513.34,3105.34 ccw(c4585.08,3096.92) 4512.84,3096.92 U7.4@4512.84,3067.45 4512.84,3015.94 4474.03,2977.12 cw(c4471.8,2988.1) 4471.8,2976.9 4370,2976.9 ; 4369.73,2937.53 4369.73,2976.23 cw(c4370.66,2976.23) 4370,2976.9
  Top Layer w30: L2.2@4136,2658 ccw(c4121.64,2672.36) 4141.67,2669.02 ccw(c4121.64,2672.36) 4141.95,2672.36 C36.2@4141.95,2744.73 C35.2@4141.95,2824.82 ; R27.2@4794.37,3345.68 R28.2@4873.37,3345.68
  Top Layer w40: L2.2@4141.67,2655 ccw(c4141.01,2655.66) 4141.95,2655.66 L2.2@4141.95,2658
  Bottom Layer w10: v1(4232,2938) 4232,2786 v1(4234,2784) ; v1(4583,3198) 4624.86,3239.86 ccw(c4590.72,3274) v1(4639,3274)
5V: ALARM.1 C1.2 C2.2 C11.1 C14.2 C20.1 C24.1 CAN.4 D2.2 D9.A DPLC-L.1 J1.5 J2.5 LED.1 MOTOR.9 RELAY.3 SCREEN.4 U2.9 U4.3 USART1.1 VR2.3 VR3.3 VR4.3 VR5.3 | length 13830.1
  Top Layer w10: 3211.45,3164.45 3230.99,3183.99 SCREEN.4@3571,3524 ; VR2.3@3827.06,1725.06 VR2.3@3827.06,1755.79 ; 5510,3122 U2.9@5548.56,3122
  Top Layer w20: MOTOR.9@5548.56,2631 5663.52,2631 ccw(c5663.52,2692.49) J1.5@5707,2649.01 ; U2.9@5548.56,3122 5557,3122 ccw(c5557,3242.71) 5642.36,3157.36 5698.67,3213.67 cw(c5714,3198.34) J2.5@5714,3220.02
  Top Layer w30: DPLC-L.1@3176,2784 3235.06,2784 cw(c3235.06,2702.06) USART1.1@3293,2760 ; RELAY.3@3177,1722 3177,1692 ccw(c3297.71,1692) 3212.35,1606.65 3605.64,1213.36 ccw(c3691,1298.71) 3691,1178 v1(3736,1178) ; 3217,2788 cw(c3229.07,2800.07) 3212,2800.07 3212,3119 cw(c3332.71,3119) 3230.99,3183.99 cw(c3332.71,3119) 3247.36,3204.36 3564.17,3521.17 cw(c3571,3514.34) SCREEN.4@3571,3524 ; SCREEN.4@3572,3522 3572,3543 cw(c3692.71,3543) 3607.36,3628.36 4166.64,4187.64 cw(c4252,4102.29) 4252,4223 5572,4223 cw(c5572,4102.29) 5657.36,4187.64 5785.64,4059.36 cw(c5700.29,3974) 5821,3974 5821,3377.02 cw(c5700.29,3377.02) 5785.64,3291.66 J2.5@5714,3220.02 ; 3735.32,1196 D9.A@3735.32,1337.23 ccw(c3731.15,1341.4) 3737.04,1341.4 C14.2@3737.04,1430 ccw(c3705.62,1461.42) 3750.06,1461.42 C11.1@3750.06,1554 ; v1(3750.06,1554.66) cw(c3854.83,1554.66) 3780.74,1628.74 3791.7,1639.7 ccw(c3706.35,1725.06) 3800.43,1649.43 ccw(c3706.35,1725.06) 3825.02,1702.96 ccw(c3706.35,1725.06) VR2.3@3827.06,1725.06 ; LED.1@4367,1229 4413.44,1182.56 ccw(c4451,1220.11) 4451,1167 4899,1167 ccw(c4899,1287.71) 4984.36,1202.36 5299.63,1517.63 cw(c5384.99,1432.28) 5384.99,1552.99 CAN.4@5725,1552.99 ; 5636,1556 5636,2626.17
  Bottom Layer w10: U4.3@4957.64,2192 5000,2192 5015.14,2207.14 5081,2273 5090.95,2273
  Bottom Layer w20: U4.3@4957.64,2192 ccw(c4957.64,2308.76) 5015.14,2207.14 ccw(c4957.64,2308.76) 5040.2,2226.2 5073.96,2259.96 cw(c5132,2201.92) 5090.95,2273 cw(c5132,2201.92) 5132,2284 v1@5649.17,2284
  Bottom Layer w30: VR5.3@3211.45,2994 VR5.3@3211.45,2993.89 3211.45,2869.45 cw(c3090.74,2869.45) 3176.09,2784.09 DPLC-L.1@3176,2784 3235.06,2784 cw(c3235.06,2702.06) USART1.1@3293,2760 3391.09,2661.91 ccw(c3476.45,2747.26) 3476.45,2626.55 C24.1@3524,2626.55 3524,2517.52 ccw(c3537.47,2517.52) C20.1@3527.94,2508 cw(c3527.81,2507.86) 3528,2507.86 VR4.3@3528,2372.3 ; v1(3736,1178) v1(3736,1148.1) cw(c3615.29,1148.1) 3700.64,1062.75 D2.2@3695.9,1058 4146,1058 ccw(c4146,1178.71) 4231.36,1093.36 LED.1@4367,1229 ; ALARM.1@5490,3796 ALARM.1@5499.51,3796 ; J1.5@5707,2649.01 C2.2@5824.71,2649.01 ; 5860.37,2649.96 5878,2649.96 ccw(c5878,2674) 5895,2657 ccw(c5863.62,2688.38) 5904.21,2670.43
  Bottom Layer w50: ALARM.1@5499.51,3795 5680,3795 cw(c5680,3674.29) 5765.36,3759.64 5779.64,3745.36 cw(c5694.29,3660) 5815,3660 C1.2@5815,3220.02 ; J2.5@5714,3220.02 C1.2@5815,3220.02 ; C2.2@5824.71,2649.01 5847.67,2649.01 ccw(c5847.67,2734.33) 5860.37,2649.96 ; 5904.21,2670.43 ccw(c5847.67,2734.33) 5908,2674 ccw(c5871.79,2710.21) 5923,2710.21 5923,3150.64 ccw(c5837.64,3150.64) 5898,3211 ccw(c5876.22,3189.22) 5876.22,3220.02 C1.2@5815,3220.02
  other v1: 3708,1148 3764,1150 3709,1178 3763,1178 3750,1519 3750,1537 5604,2282 5629,2283 5653,2283.59
12V: C10.1 C13.2 C19.1 C22.2 D8.A FAN.2 VR1.3 VR2.1 VR4.1 | length 3011.2
  Top Layer w10: 3636,1756.74 3639,1756.74 3639.94,1755.79 VR2.1@3708.94,1755.79
  Top Layer w30: D8.A@3420.91,1592.32 3420.91,1697.77 cw(c3504.33,1697.77) C13.2@3445.34,1756.75 C10.1@3569.96,1756.75 ; C10.1@3570,1756.74 3636,1756.74 ; 3639,1756.74 3706.66,1756.74 cw(c3706.66,1753.51) VR2.1@3708.94,1755.79
  Bottom Layer w10: C19.1@3527.94,2046 3527.94,2099 ; 3528,2208.04 VR4.1@3528,2254.19
  Bottom Layer w30: VR1.3@3419,1595.06 ccw(c3419,1650.72) 3458.36,1611.36 3560.07,1713.07 ccw(c3531.15,1742) v1(3572.06,1742) ; C19.1@3527.94,2046 C19.1@3527.94,2036 3527.94,1877 ccw(c3648.65,1877) 3563.3,1791.64 ; 3527.94,2099 3527.94,2254.06 cw(c3528.14,2254.06) VR4.1@3528,2254.19 ; C19.1@3528,2046 3528,2208.04 ; 3563.32,1791.62 cw(c3542.16,1770.5) 3572.06,1770.5 v1(3572.06,1742) ; FAN.2@4698,1221.76 FAN.2@4698,1231 cw(c4644.89,1231) 4682.44,1193.44 4660,1171 cw(c4645.51,1185.49) 4645.51,1165 4614,1165 cw(c4614,1285.71) 4543.64,1187.63 cw(c4614,1285.71) 4528.64,1200.36 4448,1281 ccw(c4435.93,1268.93) 4435.93,1286 3795,1286 cw(c3795,1406.71) 3709.64,1321.36 3693.36,1337.64 cw(c3778.71,1423) 3658,1423 3658,1593 ccw(c3537.29,1593) 3622.64,1678.36 3581.29,1719.71 cw(c3603.58,1742) v1(3572.06,1742)
  other v1: 3549,1741 3594,1742
24V: C9.1 C12.2 D7.A L.3 VR1.1 | length 535.1
  Bottom Layer w30: C9.1@3198.25,1410.94 3203,1410.94 3217.89,1410.94 ccw(c3217.89,1531.65) 3303.24,1446.3 C12.2@3322.9,1465.96 3392.48,1465.96 ccw(c3392.48,1503.46) VR1.1@3419,1476.94
  Bottom Layer w40: L.3@3063.28,1430 ccw(c3109.28,1476.01) 3109.28,1410.94 C9.1@3198.25,1410.94 ; C9.1@3203,1410.94 ccw(c3214.47,1399.47) 3198.25,1399.47 3198.25,1388.34 ccw(c3318.96,1388.34) 3233.6,1302.98 D7.A@3258.37,1278.21
32K: RP2.7 U5.1 | length 381.4
  Top Layer w10: U5.1@4193.87,1802 cw(c4307.01,1802) 4227.01,1882.01 4337.62,1992.62 cw(c4382,1948.23) 4338.66,1993.64 cw(c4382,1948.23) 4382,2011 4414.34,2011 cw(c4414.34,1997.34) 4424,2007 cw(c4423.39,2006.39) 4424.25,2006.39 RP2.7@4424.25,1963.32
ACTLED: R38.1 U7.27 | length 967.8
  Top Layer w10: U7.27@4394.73,2748.55 v1(4394.73,2838) ; v1(4710,3096) 4953.46,3339.46 ccw(c4944.93,3348) R38.1@4957,3348
  Bottom Layer w10: v1(4394.73,2838) 4614,2838 4689.56,2913.56 ; 4682,2905 ccw(c4616.82,2970.18) 4689.56,2913.56 ; v1(4710,3096) ccw(c4712.41,3093.59) 4709,3093.59 4709,2970.18 cw(c4616.82,2970.18) 4689.56,2913.56
ALARM: R5.1 U3.27 | length 364.1
  Bottom Layer w10: U3.27@4447.21,2571.5 4447.21,2594.98 cw(c4525.02,2594.98) 4461.84,2640.4 cw(c4525.02,2594.98) 4470,2650 cw(c4552.08,2567.92) 4481.58,2660.13 cw(c4552.08,2567.92) 4552.08,2684 4590.07,2684 ccw(c4590.07,2804.71) 4675.42,2719.36 R5.1@4714.69,2758.62
BAT: BAT.2 D6.2 U5.14 | length 823
  Top Layer w20: U5.14@4552.13,1702 4607.16,1702 ccw(c4607.16,1807.84) 4682,1733 ccw(c4624.06,1790.94) 4706,1790.94 4706,1929.2 cw(c4753.8,1929.2) 4720,1963 cw(c4765.87,1917.13) 4765.87,1982 v1(4804,1982)
  Bottom Layer w10: BAT.2@5155,1987.56 BAT.2@5155.72,1987.56
  Bottom Layer w20: v1(4804,1982) D6.2@4806,1982
  Bottom Layer w30: D6.2@4806,1980.4 5120.14,1980.4 cw(c5120.14,1931.1) BAT.2@5155,1965.96
DC+: BUS+.2 DPLC-L.6 L.2 RELAY.2 | length 3022.8
  Bottom Layer w40: L.2@2763.28,1430 2812.92,1430 ccw(c2812.92,1546.08) 2895,1464 ccw(c2832.23,1526.77) 2921,1526.77 2921,1659.89 cw(c2996.11,1659.89) 2943,1713 3141.64,1911.64 ccw(c3056.29,1997) 3177,1997 RELAY.2@3177,2122
  Bottom Layer w50: DPLC-L.6@2196,2684 2565,2684 cw(c2565,2563.29) 2650.35,2648.64 3168.29,2130.71 ccw(c3170,2132.42) RELAY.2@3170,2130 ; BUS+.2@2300,3472 2301,3472 cw(c2301,3351.29) 2386.36,3436.64 2541.64,3281.36 cw(c2456.29,3196) 2577,3196 2577,2685
DC-: BUS+.1 DPLC-L.5@2201,2484 FOLLOW.2 L.1 MAIN.2 MAIN.3 | length 2278.9
  Top Layer w50: FOLLOW.2@2232,2115 cw(c2306.84,2189.84) 2201,2189.84 DPLC-L.5@2201,2484 2353.64,2636.64 ccw(c2268.29,2722) 2389,2722 2389,3146 ccw(c2268.29,3146) 2353.64,3231.36 2322.19,3262.81 ccw(c2300,3240.62) BUS+.1@2300,3272
  Bottom Layer w40: 2146.41,1656 2587.28,1656 cw(c2587.28,1535.29) 2672.63,1620.64 L.1@2763.28,1530 ; MAIN.2@2175.36,1475.73 MAIN.2@2207.84,1443.24 2207.84,1417.16 ccw(c2328.55,1417.16) 2243.2,1331.8 2299.52,1275.48 ccw(c2327.92,1303.88) MAIN.3@2327.92,1263.72 cw(c2333.43,1258.2) MAIN.3@2333.43,1266 ; 2182.49,2094.49 cw(c2232,2044.99) FOLLOW.2@2232,2115
FAN: FAN.3 U3.51 | length 916.8
  Bottom Layer w10: U3.51@4506.27,2134.5 4506.27,1474.73 ccw(c4626.98,1474.73) 4541.62,1389.38 4562.64,1368.36 cw(c4477.29,1283) 4598,1283 FAN.3@4598,1245.26
GND: "C0 C1 C2 C3.5" "C0 C1 C2 C3.6" "C0 C1 C2 C3.7" "C0 C1 C2 C3.8" BAT.1 C1.1 C2.1 C3.1 C4.1 C5.1 C6.1 C7.1 C9.2 C10.2 C11.2 C12.1 C13.1 C14.1 C15.2 C16.2 C19.2 C20.2 C21.1 C22.1 C23.2 C24.2 C27.1 C28.2 C30.2 C31.1 C32.1 C33.1 C34.1 C35.1 C36.1 C37.2 C38.2 CAN.1 DPLC-L.4 FAN.1 GND.1 GND.2 GND.3 GND.4 L.4 LED.6 MOTOR.8 R2.2 R4.2 R6.2 R7.1 R13.1 R14.2 R15.1 R16.1 R17.1 R18.1 R37.1 R39.2 RELAY.1 RP3.5 RP4.1 RP4.2 RP4.3 RP4.4 S2.1 SCREEN.1 U2.8 U3.12 U3.18 U3.31 U3.47 U3.63 U4.2 U4.8 U5.5 U5.6 U5.7 U5.8 U5.9 U5.10 U5.11 U5.12 U5.13 U7.3 U7.14 U7.16 U7.19 U7.29 U7.48 USART1.4 VR1.2 VR2.2 VR3.1 VR4.2 VR5.1 | length 24589.2
  Top Layer w10: C10.2@3543.36,1874.85 C10.2@3570,1874.85 ; VR2.2@3768,1848 3819,1848 ; C5.1@3859.69,2322 C5.1@3859.69,2324 ; 4080.32,3114 4124.5,3114 cw(c4124.5,2994.5) 4170,3105 cw(c4124.5,2994.5) 4209,3079 cw(c4180.03,3050.03) 4221,3050.03 4221,3030.73 ccw(c4251.73,3030.73) 4230,3009 ccw(c4259.98,3038.98) v1@4259.98,2996.58 ; C31.1@4143.67,2551 4245,2551 ccw(c4245,2671.71) 4330.35,2586.35 4433.5,2689.5 4433.5,2747.95 U7.29@4434.1,2748.55 ccw(c4431.94,2750.72) U7.29@4435,2750.72 ; U5.8@4193.87,1452 U5.9@4552.13,1452 ; U5.5@4193.87,1600 U5.5@4193.87,1602 ; v1(4253,2912) 4253,2907 4257,2903 4261,2899 ccw(c4263.03,2901.03) 4263.03,2898.16 U7.19@4304.18,2898.16 ; v1(4400.63,3299) C34.1@4400.63,3345.69 ; v1(4515,3249) 4523.2,3249 ccw(c4523.2,3296.8) 4525.04,3249.04 ccw(c4523.2,3296.8) 4557,3263 ccw(c4550.65,3269.35) 4559.63,3269.35 C27.1@4559.63,3345.69 ; U7.3@4532.53,3067.45 4532.53,3040.86 ccw(c4564.86,3040.86) 4542,3018 ccw(c4546.18,3022.18) 4546.18,3016.27 U7.48@4623.08,3016.27 4651.23,3016.27 ccw(c4651.23,3018.77) 4653,3017 ccw(c4645.76,3024.24) 4656,3024.24 v1(4656,3044) ; v1(4858.94,2800) RP4.1@4858.94,2827.11 RP4.2@4858.94,2864.51 RP4.3@4858.94,2896.01 RP4.4@4858.94,2933.41 RP3.5@4858.94,3004.45
  Top Layer w20: U5.12@4552.13,1602 4803.59,1602 ccw(c4803.59,1605.41) 4805.25,1602.43 ; v1(4809.04,1610.34) cw(c4798.66,1610.34) 4806,1603 cw(c4803.59,1605.41) 4805.25,1602.43 ; v1(5058,2122) 5058,2229 ; MOTOR.8@5343.83,2631 5476.17,2631 cw(c5476.17,2624.17) 5481,2629 ; U2.8@5343.83,3122 5416.13,3122 cw(c5416.13,3057.13) 5462,3103 cw(c5416.13,3057.13) 5481,3057.13 5481,2629 ; 4805.25,1602.43 ccw(c4795.99,1701.01) 4866,1631 ccw(c4841.76,1655.24) 4876.04,1655.24 R13.1@4876.04,2230.38 5337.38,2230.38 ccw(c5337.38,2351.09) 5422.74,2265.74 5445.64,2288.64 ccw(c5360.29,2374) 5481,2374 5481,2629
  Top Layer w30: DPLC-L.4@3176,2484 3235.06,2484 cw(c3235.06,2402.06) USART1.4@3293,2460 3409.99,2343.01 cw(c3324.63,2257.66) 3445.34,2257.66 C13.1@3445.34,1826.83 3458,1839.49 cw(c3543.36,1754.14) 3530.31,1874.14 cw(c3543.36,1754.14) C10.2@3543.36,1874.85 ; R17.1@3565,1425.31 cw(c3576.31,1414) 3576.31,1430 C14.1@3666.96,1430 3664.36,1432.6 cw(c3749.71,1517.96) 3629,1517.96 C11.2@3629,1550 ; C10.2@3570,1874.85 3727.99,1874.85 cw(c3727.99,1830.99) VR2.2@3759,1862 ; C11.2@3631.95,1554.66 3631.95,1584.76 cw(c3707.24,1584.76) 3640.18,1619 cw(c3707.24,1584.76) 3654,1638 cw(c3699.87,1592.13) 3699.87,1657 ccw(c3699.87,1734.57) 3754.72,1679.72 ccw(c3722.66,1711.78) 3768,1711.78 VR2.2@3768,1759.73 VR2.2@3768,1848 ; S2.1@3768.25,2185 ccw(c3768.86,2184.39) 3768,2184.39 VR2.2@3768,1854.22 3840.02,1854.22 cw(c3840.02,1792.02) 3884,1836 cw(c3876.76,1828.76) 3887,1828.76 3887,1277.28 cw(c3818.72,1277.28) LED.6@3867,1229 ; C5.1@3859.69,2324 3859.69,2708.34 3925.57,2708.34 ccw(c3925.57,2816.43) 4002,2740 cw(c4013.43,2728.57) 4013.43,2744.73 C36.1@4077,2744.73 ; SCREEN.1@3871,3524 3839.36,3492.36 ccw(c3924.71,3407) 3804,3407 3804,3165 4061,3165 cw(c4061,3137.69) R37.1@4080.32,3157 ; 4080.32,3105 C38.2@4080.32,3071 C37.2@4080.32,2985 cw(c4077.9,2982.59) 4081.32,2982.59 R39.2@4081.32,2904.91 C35.1@4081.32,2824.82 C36.1@4081.32,2744.73 ; 4080.32,3114 R37.1@4080.32,3157 ; v1(4140,1390) ccw(c4140,1421.38) 4162.19,1399.19 4178.92,1415.92 ccw(c4142.84,1452) U5.8@4193.87,1452 ; C32.1@4162.63,3345.69 C33.1@4082.63,3345.69 ccw(c4088.22,3340.1) 4080.32,3340.1 R37.1@4080.32,3157 ; R13.1@4880.02,2257 cw(c4966.96,2230.38) 4902.67,2294.67 5024.52,2416.52 ccw(c4941.03,2500) R13.1@5059.1,2500 5059.1,2714.02 cw(c5109.98,2714.02) v1(5074,2750)
  Top Layer w40: RELAY.1@2677,1922 2848.57,1922 cw(c2848.57,1819.57) 2921,1892 cw(c2843.75,1814.75) 2953,1814.75 2953,1631 ccw(c3073.71,1631) 2988.36,1545.64 ccw(c3018.88,1576.17) 3018.88,1533 v1(3064,1533) ; R16.1@3501,1590.56 3617.94,1590.56 cw(c3617.94,1570.75) C11.2@3631.95,1584.76 ; U5.8@4193.87,1452 U5.7@4193.87,1502 U5.6@4193.87,1552 U5.5@4193.87,1600 ; U5.9@4552.13,1452 U5.10@4552.13,1502 U5.11@4552.13,1552 U5.12@4552.13,1602
  Top Layer w50: CAN.1@5725,1252.99 5732.79,1252.99 ccw(c5732.79,1345.21) 5798,1280 ccw(c5723.16,1354.84) 5829,1354.84 GND.1@5829,2166 GND.2@5829,2266 GND.3@5829,2366 GND.4@5829,2466 5829,2714.76 ccw(c5818.76,2714.76) v1(5826,2722) 5826,3143
  Bottom Layer w10: 3473,2290.79 3473,2300 3486.25,2313.25 ; VR4.2@3531.94,2313.25 VR4.2@3625,2313.25 ; VR4.2@3626.43,2313.25 3705,2313.25 3708.25,2310 3754.68,2310 3788.34,2310 C4.1@3788.34,2290 ; VR4.2@3626.43,2314 VR4.2@3626.43,2314.71 ; 3804,3165 ccw(c3842.63,3165) 3815.31,3137.69 ; 3958.04,1512 4000,1512 4019.1,1492.9 ; v1(4077,2742) 4077,2532 ccw(c4197.71,2532) 4112.36,2446.64 4123,2436 ccw(c4157.05,2470.05) 4157.05,2421.9 U3.12@4179.5,2421.9 ; C16.2@4214.06,1746.34 4214.06,1802 4226.04,1813.98 C15.2@4226.04,1871 4226.04,1921 4225.96,1921.08 R7.1@4225.96,1972 4225.96,1973.92 4270.05,2018.01 U3.63@4270.05,2134.5 4270.05,2180 4315.1,2225.05 U3.47@4616.5,2225.05 ; v1(4226,2551) 4226,2528.66 ccw(c4239.66,2528.66) 4230,2519 ccw(c4246.9,2535.9) 4246.9,2512 4250.93,2512 ccw(c4250.93,2529.07) 4263,2517 ccw(c4245.98,2534.02) 4270.05,2534.02 U3.18@4270.05,2571.5 4270.05,2877.16 ccw(c4239.16,2877.16) 4261,2899 ; C30.2@4262,2950 ccw(c4264.41,2947.59) 4261,2947.59 4257,2943.59 4253,2939.59 v1(4253,2912) ; v1(4262.95,2958.5) 4262.95,2957.05 4263,2957 ccw(c4260.59,2959.41) 4264,2959.41 v1(4264,2997) ; v1@4265.01,2997 4265.01,3157.01 cw(c4385.72,3157.01) 4300.36,3242.36 cw(c4321.21,3221.52) 4321.21,3251 4398,3251 ; v1(4400.63,3299) 4400.63,3257.35 cw(c4391.65,3257.35) 4398,3251 ; v1(4515,3249) ccw(c4510.17,3244.17) 4510.17,3251 4398,3251 ; U3.31@4525.95,2571.5 4525.95,2605.16 cw(c4556.84,2605.16) 4529.72,2619.94 cw(c4556.84,2605.16) 4535,2627 cw(c4539.83,2622.17) 4539.83,2629 4761,2629 cw(c4761,2508.29) 4846.36,2593.64 ccw(c4888.95,2636.24) 4888.95,2576 v1(5059,2576) ; C28.2@4656.29,2945.68 cw(c4614.32,2945.68) 4644,2916 cw(c4586.06,2973.94) 4586.06,2892 4277.9,2892 cw(c4277.9,2915.9) 4261,2899 ; C28.2@4656.29,2954 4656.29,3091.84 cw(c4720.16,3091.84) 4675,3137 cw(c4711.21,3100.79) 4711.21,3152 4882.86,3152 cw(c4882.86,3117.86) 4907,3142 cw(c4879.68,3114.68) 4918.32,3114.68 R4.2@4918.32,2989 ; R2.2@4775.32,2676 R2.2@4775.32,2677 ; R2.2@4776,2676 4776,2631.41 ccw(c4779.41,2631.41) 4777,2629 ; v1(4858.94,2800) 5064.34,2800 ccw(c5064.34,2813.66) 5074,2804 ; U4.2@4957.64,2142 5002.64,2142 cw(c5002.64,2056.64) 5048.13,2128.87 cw(c5002.64,2056.64) 5063,2117 ccw(c5123.36,2177.36) 5123.36,2092 U4.8@5162.36,2092 ; v1@4253,2907 4261,2899 ; v1@4253,2907 v1(4253,2912) ; v1@4253,2907 v1(4253,2912) ; v1@4253,2907 4257,2903 4261,2899
  Bottom Layer w30: C23.2@3372.04,3517 C23.2@3381.7,3507.34 ; VR5.1@3392.55,2993.89 3392.55,2878.08 ccw(c3513.26,2878.08) 3427.91,2792.73 C24.2@3524,2696.63 3571.6,2696.63 cw(c3571.6,2629.6) 3619,2677 cw(c3553.68,2611.68) 3646.06,2611.68 C20.2@3646.06,2508 3646.06,2364.08 cw(c3574.17,2364.08) 3626.43,2314.71 cw(c3574.17,2364.08) VR4.2@3625,2313.25 ; VR1.2@3422.94,1536 3215.02,1536 ccw(c3215.02,1512.28) C9.2@3198.25,1529.05 cw(c3201.13,1529.05) 3199.09,1531.09 3389.64,1721.64 ccw(c3304.29,1807) 3425,1807 3425,2193 cw(c3545.71,2193) 3460.36,2278.36 3469.3,2287.3 cw(c3531.94,2224.66) 3473,2290.79 cw(c3531.94,2224.66) VR4.2@3531.94,2313.25 ; VR1.2@3517.43,1536 3548.64,1504.78 cw(c3463.29,1419.43) 3584,1419.43 R14.2@3584,1283.04 3609.54,1283.04 cw(c3609.54,1219.25) 3654.64,1264.36 ccw(c3740,1349.71) 3740,1229 LED.6@3867,1229 ; VR4.2@3626.43,2314 VR4.2@3626.43,2313.25 3626.43,2231.53 cw(c3529.51,2231.53) C22.1@3598.04,2163 3611.64,2149.4 cw(c3526.29,2064.04) 3647,2064.04 C19.2@3647,2036 ; 3705,2313.25 3732.22,2313.25 cw(c3732.22,2233.88) 3754.68,2310 cw(c3732.22,2233.88) C4.1@3788.34,2290 3788.34,2128.91 cw(c3787.05,2128.91) C3.1@3787.96,2128 ; VR3.1@3920.52,1511.89 3954.11,1511.89 cw(c3954.11,1391.18) 4019.1,1492.9 cw(c3954.11,1391.18) 4039.47,1476.53 cw(c3984.3,1421.37) 4052.18,1459.82 cw(c3984.3,1421.37) 4062.31,1421.37 R18.1@4062.31,1389 4137.59,1389 ccw(c4137.59,1392.41) v1(4140,1390) ; 3958.04,1512 ccw(c3952.89,1632.6) 4038.25,1547.25 4197.59,1706.59 ccw(c4157.83,1746.34) C16.2@4214.06,1746.34 ; v1(4809.04,1610.34) C6.1@4809.04,1518.22 ccw(c4835.69,1491.57) 4798,1491.57 FAN.1@4798,1231 5081.28,1231 cw(c5081.28,1125.72) 5155.72,1200.16 5622.17,1200.16 ccw(c5622.17,1320.87) 5707.53,1235.52 CAN.1@5725,1252.99 ; R4.2@4918.32,2989 4956,2989 cw(c4956,2868.29) 5015.92,2973.08 cw(c4956,2868.29) 5041.36,2953.64 5044,2951 cw(c4971.57,2878.57) 5061.63,2927.37 cw(c4971.57,2878.57) 5069,2910.18 cw(c4971.57,2878.57) 5074,2878.57 5074,2804 v1(5074,2750)
  Bottom Layer w40: L.4@3064,1530 3191.59,1530 ccw(c3191.59,1533.41) C9.2@3194,1531 ; VR1.2@3422.94,1536 VR1.2@3517.43,1536 ; R15.1@3484.38,1279.21 3574.77,1279.21 ccw(c3574.77,1292.27) R14.2@3584,1283.04
  Bottom Layer w50: C23.2@3372.04,3511 3381.7,3501.34 cw(c3296.35,3415.98) 3417.06,3415.98 C21.1@3417.06,3376 3417.06,3301.94 ccw(c3537.77,3301.94) 3452.41,3216.59 3504,3165 3604,3165 3704,3165 3804,3165 ; C1.1@5815,3144.96 5815,2748.56 ccw(c5852.56,2748.56) 5816.36,2738.53 ccw(c5852.56,2748.56) v1(5826,2722)
  other v1: 4170,1390 4198,1390 3016,1531 3042,1532 3014,1553 3041,1554 3064,1555 4868,1609 4899,1609 4931,1609 4964,1609 4835,1610 5075,2106 5037,2133 3415,2152 3385,2154 3355,2155 3355,2183 3384,2183 3414,2183 5826,2749 5826,2777 5825,2807
LED1: D3.A U3.30 | length 351.6
  Top Layer w10: v1(4506.27,2522) 4753.81,2522 cw(c4753.81,2452.49) D3.A@4802.96,2501.64
  Bottom Layer w10: v1(4506.27,2522) U3.30@4506.27,2571.5
LED2: D4.A U3.52 | length 308.8
  Bottom Layer w10: U3.52@4486.58,2134.5 4486.58,2183 4581,2183 cw(c4581,2062.29) 4666.36,2147.64 ccw(c4706.54,2187.83) 4699.48,2131.44 ccw(c4706.54,2187.83) 4706.54,2131 v1(4733,2131)
LINKLED: R36.1 U7.25 | length 1211
  Top Layer w10: U7.25@4355.36,2748.55 4355.36,2830.36 v1(4522,2997) ; v1(4003.63,3346.69) cw(c4006.8,3343.51) 4006.8,3348 ccw(c4006.8,3343.51) v1(4003.63,3346.69)
  Bottom Layer w10: v1(4003.63,3346.69) cw(c4009.22,3341.1) 4009.22,3349 4485.23,3349 cw(c4485.23,3260.23) 4548,3323 cw(c4540.76,3315.76) 4551,3315.76 4551,3067.01 cw(c4451.99,3067.01) 4545.87,3035.56 cw(c4451.99,3067.01) v1(4522,2997)
Net*1_4: D1.K RELAY.4 | length 346
  Top Layer w50: D1.K@2454,2187.04 2658.81,2187.04 cw(c2658.81,2066.33) 2744.17,2151.68 RELAY.4@2777,2118.85
Net*1_5: D5.K RELAY.5 | length 252.7
  Top Layer w50: D5.K@2618,1590.6 2618,1654.86 cw(c2652.14,1654.86) 2628,1679 2635.64,1686.64 cw(c2721,1601.29) 2721,1722 RELAY.5@2777,1722
NetBUS1_2: 
NetC3_2: C3.2 U3.5 Y1.2 | length 391
  Bottom Layer w10: C3.2@3858.04,2128 C3.2@3863,2128 ; Y1.2@3975,2130.29 cw(c4012.92,2130.29) 3980.1,2149.29 cw(c4012.92,2130.29) 3986.11,2157.11 4097,2268 cw(c4135.87,2229.13) 4135.87,2284.1 U3.5@4179.5,2284.1
  Bottom Layer w30: C3.2@3863,2128 3969.47,2128 ccw(c3969.47,2135.82) 3972.97,2128.83 ccw(c3969.47,2135.82) Y1.2@3975,2130.29
NetC4_2: C4.2 U3.6 Y1.1 | length 313.5
  Bottom Layer w10: C4.2@3858.42,2310 C4.2@3858.42,2310.71 ; Y1.1@3983.75,2303.79 U3.6@4179.5,2303.79
  Bottom Layer w30: C4.2@3858.42,2290 3970.88,2290 ccw(c3970.88,2295.83) Y1.1@3975,2291.71
NetC5_2: C5.2 R8.2 S2.2 U3.7 | length 577.3
  Top Layer w10: C5.2@3920.32,2322 cw(c3995.92,2322) 3942.46,2375.46 3947.22,2380.22 cw(c3966,2361.44) v1(3966,2388) ; R8.2@3998.44,2323 3998.44,2264.55 ccw(c4092.55,2264.55) 4026,2198 4028.57,2195.43 ccw(c4061,2227.87) 4044.68,2185 ccw(c4061,2227.87) 4061,2182 ccw(c4061.01,2192.24) S2.2@4068.25,2185
  Top Layer w40: C5.2@3920.32,2322 3996.02,2322 ccw(c3996.02,2325.41) R8.2@3998.44,2323
  Bottom Layer w10: v1(3966,2388) cw(c3966,2315.57) 4017.21,2366.79 4025.17,2358.83 ccw(c4110.53,2444.18) 4052.06,2338.58 ccw(c4110.53,2444.18) 4110.53,2323.47 U3.7@4179.5,2323.47
NetC17_1: 
NetC18_1: 
NetC26_2: C26.2 J13.3 | length 181.3
  Top Layer w10: J13.3@4632,3558.5 ccw(c4744.26,3558.5) 4642.3,3511.52 ccw(c4744.26,3558.5) 4664.88,3479.12 4705.16,3438.84 cw(c4672.64,3406.32) C26.2@4718.63,3406.32
NetC27_2: C27.2 J13.4 R29.1 | length 338.4
  Top Layer w10: C27.2@4559.63,3406.32 4559.63,3464.21 cw(c4584.79,3464.21) 4561.6,3473.97 cw(c4584.79,3464.21) 4567,3482 ccw(c4530.79,3518.21) 4582,3518.21 J13.4@4582,3658.5
  Top Layer w30: C27.2@4559.63,3406.32 4637.22,3406.32 ccw(c4637.22,3409.72) R29.1@4639.63,3407.31
NetC28_1: C28.1 R33.2 U7.31 Y2.3 | length 394.1
  Top Layer w10: U7.31@4473.47,2748.55 4473.47,2829.2 cw(c4553.8,2829.2) 4497,2886 v1(4497,2937)
  Bottom Layer w10: R33.2@4499.04,2954 4499.04,3049.37 cw(c4520.44,3049.37) Y2.3@4505.31,3064.5
  Bottom Layer w30: R33.2@4499.04,2954 C28.1@4586.21,2954
NetC29_2: C29.2 J13.6 | length 430
  Top Layer w10: C29.2@4241.63,3406.32 cw(c4307.58,3406.32) 4260.95,3452.95 cw(c4340.74,3373.15) 4340.74,3486 4415.06,3486 ccw(c4415.06,3567.94) 4473,3510 ccw(c4451.27,3531.73) 4482,3531.73 J13.6@4482,3658.5
NetC30_1: C30.1 R33.1 U7.30 Y2.1 | length 545.4
  Top Layer w10: U7.30@4453.79,2748.55 4453.79,2897.91 cw(c4466.88,2897.91) 4457.62,2907.16 v1@4459.68,2909.22
  Bottom Layer w10: Y2.1@4418.69,3127.5 4389.75,3127.5 ccw(c4389.75,3088.25) 4362,3116 ccw(c4410.8,3067.2) 4341.79,3067.2 C30.1@4341.79,2950 4419.3,2950 ccw(c4419.3,2963.66) R33.1@4428.96,2954 ccw(c4460.25,2954) 4433.55,2937.68 ccw(c4460.25,2954) 4438.12,2931.88 v1(4460,2910)
  Bottom Layer w30: R33.1@4419.3,2950 4424.59,2950 cw(c4424.59,2946.59) R33.1@4427,2949
NetC32_2: C32.2 C33.2 J13.8 J13.13 J13.14 | length 1010.8
  Top Layer w10: C32.2@4162.63,3406.32 4162.63,3518.5 cw(c4237.79,3518.5) 4184.64,3571.64 cw(c4270,3486.29) 4270,3607 4286,3607 ccw(c4286,3727.71) 4307.88,3609 ccw(c4286,3727.71) 4371.36,3642.36 4378.11,3649.11 ccw(c4368.72,3658.5) J13.8@4382,3658.5
  Top Layer w30: C33.2@4082.63,3406.32 C32.2@4162.63,3406.32
  Bottom Layer w10: J13.14@4214,4069.5 J13.13@4314,4069.5 4346.64,4036.86 cw(c4261.29,3951.5) 4382,3951.5 J13.8@4382,3658.5
NetC34_2: C34.2 J13.5 R34.1 R35.1 | length 323.9
  Top Layer w10: R35.1@4480.63,3407.31 cw(c4551.41,3407.31) 4501.36,3457.36 ccw(c4427.4,3531.33) 4528.63,3505 ccw(c4427.4,3531.33) 4532,3531.33 J13.5@4532,3558.5
  Top Layer w30: R34.1@4321.63,3407.31 R35.1@4480.63,3407.31
NetC37_1: C37.1 U7.22 | length 208.1
  Top Layer w10: C37.1@4140.95,2985 cw(c4140.95,2972.8) 4149.57,2981.43 cw(c4076.11,2907.97) 4173.26,2944.79 cw(c4076.11,2907.97) 4180,2907.97 ccw(c4199.24,2907.97) 4185.63,2894.37 4217.81,2862.19 ccw(c4268.48,2912.87) 4268.48,2841.2
NetC38_1: C38.1 U7.20 | length 289.1
  Top Layer w10: C38.1@4140.95,3071 ccw(c4160.14,3071) 4146.57,3057.43 4164.64,3039.36 cw(c4079.29,2954) 4190.85,3000.1 cw(c4079.29,2954) 4191.26,2999.11 cw(c4079.29,2954) 4200,2954 4200,2930.97 ccw(c4240.97,2930.97) 4212,2902 ccw(c4268.8,2958.8) 4268.8,2878.47 U7.20@4304.18,2878.47
NetD1_A: D1.A R9.2 | length 136.5
  Top Layer w40: D1.A@2454,2116.96 cw(c2446.76,2109.72) 2457,2109.72 R9.2@2457,1981.3
NetD2_1: D2.1 Q3.3 | length 144.4
  Bottom Layer w30: Q3.3@3414,1056.79 3555.18,1056.79 ccw(c3555.18,1060.93) D2.1@3558.1,1058
NetD3_A: D5.A R11.2 | length 135.7
  Top Layer w50: R11.2@2618,1384.86 D5.A@2618,1520.53
NetD3_K: D3.K R13.2@4989.02,2500 | length 116.4
  Top Layer w10: D3.K@4873.04,2501.64 4985.06,2501.64 cw(c4985.06,2496.04) R13.2@4989.02,2500